# Altium PCB RNG_SATA.PcbDoc (part 2 of 2)
Units mm, origin at the board's own origin, x right, y up, seen from the top; angles counter-clockwise.
Board outline 120 x 50.5 mm, 2 copper layers (TOP, BOT), stack 1.57 mm thick; 83 components, 48 nets, 231 pads, 421 vias.
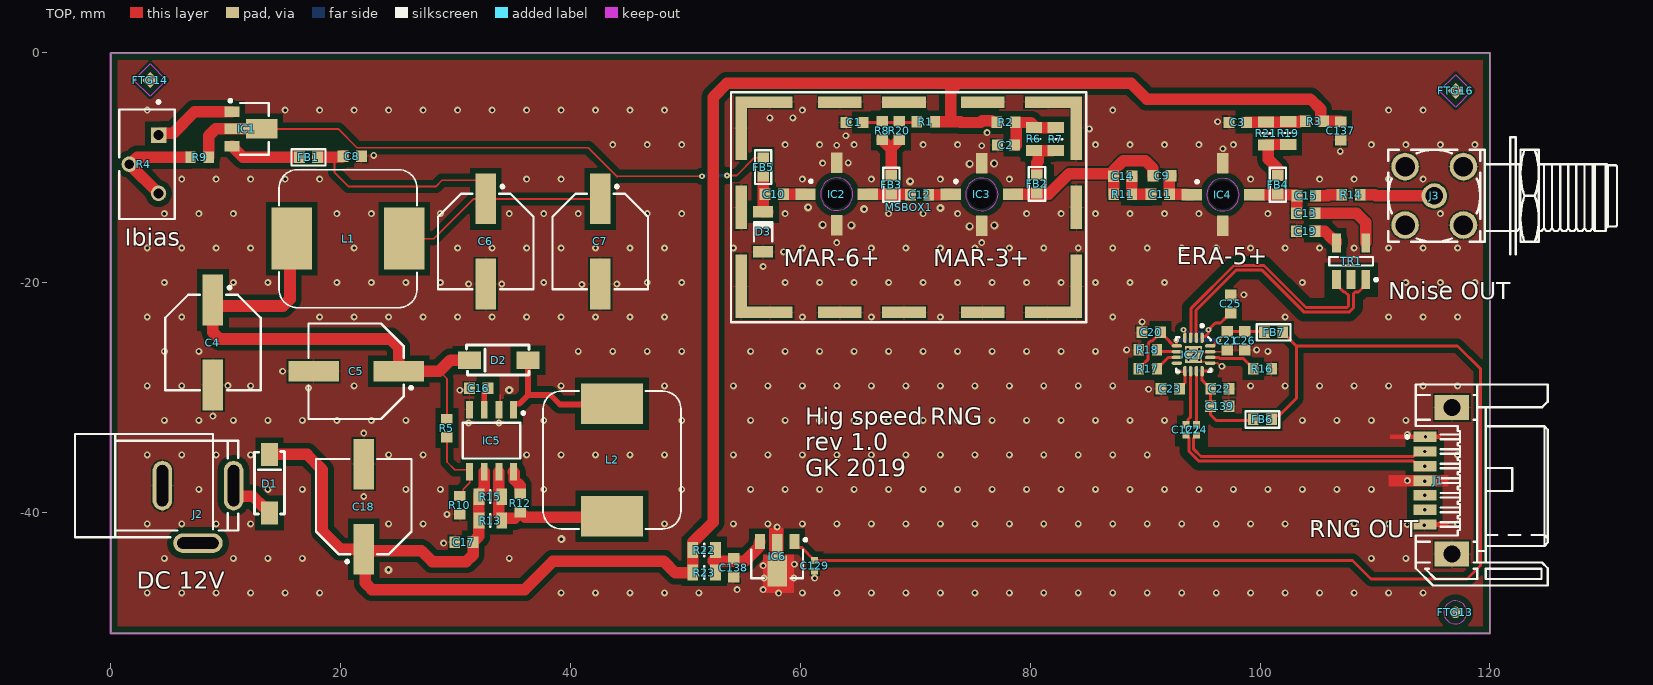
[diagram p0: TOP view]

## Via types
v1: diameter 0.6, hole 0.3, TOP to BOT, tented both sides, 395 vias
v2: diameter 0.5, hole 0.2, TOP to BOT, tented both sides, 13 vias
v3: diameter 0.7, hole 0.3, TOP to BOT, tented both sides, 7 vias
v4: diameter 0.7, hole 0.4, TOP to BOT, tented both sides, 6 vias

## Nets (pads, with @x,y where several pads share a name; then routed paths per layer and width w, separated by ;. In a path a pad name is that pad's centre, name@x,y a point inside that pad or via, vN(x,y) a via of type N, cw(c..) or ccw(c..) an arc to the next point about the centre after c; other vN are vias at no path point) (continued)
NetD2_A: (continued)
  TOP w0.508: IC5.1 35.04,-30.556 35.086,-30.51 35.561,-30.51 36.32,-29.751 ; D2.A 36.32,-29.751 ; L2.2@42.592,-30.591 39.1,-30.591 38.26,-29.751 36.32,-29.751
NetFB1_2: FB1.2 IC1.3 | length 6.3
  TOP w1.016: IC1.3 10.63,-8.104 10.688,-8.162 10.688,-8.246 11.516,-9.074 FB1.2
NetFB2_2: FB2.2 R6.1 R7.1 | length 3.3
  TOP w1: FB2.2 80.587,-9.568 80.714,-9.441 80.714,-8.499 R7.1@81.911,-8.499
NetFB3_2: FB3.2 R8.1 R20.1 | length 4.5
  TOP w1: R8.1 67.912,-8.347 ; FB3.2 67.912,-8.347 ; R20.1 67.912,-8.262 67.912,-8.347
NetFB4_2: FB4.2 R19.1 R21.1 | length 5
  TOP w1: R21.1 R21.1@100.705,-7.992 ; FB4.2 101.538,-10.056 100.73,-9.248 100.73,-8.017 R21.1@100.705,-7.992 ; R19.1 100.734,-7.963 R21.1@100.705,-7.992
NetFB5_1: FB5.1 IC1.2 R9.1 | length 52.8
  TOP w0.152: IC1.2@13.146,-6.604 19.802,-6.604 21.436,-8.238 41.554,-8.238 44.086,-10.77 44.131,-10.725 v2(51.442,-10.725) ; v2(53.619,-10.661) 54.459,-10.661 55.996,-9.125 FB5.1
  TOP w1.016: R9.1 8.546,-7.199 9.141,-6.604 10.846,-6.604 IC1.2@13.146,-6.604
  BOT w0.152: v2(51.442,-10.725) 51.535,-10.725 51.58,-10.77 51.688,-10.661 v2(53.619,-10.661)
NetIC1_1: IC1.1 R4.1 | length 7.2
  TOP w1.016: R4.1 4.333,-6.97 5.429,-6.97 7.296,-5.104 IC1.1
NetIC5_5: IC5.5 R5.1 R10.2 | length 6.9
  TOP w0.152: R5.1 29.261,-35.589 29.934,-36.262 31.061,-36.262 IC5.5 31.23,-37.386 30.665,-37.952 30.665,-38.261 R10.2
NetIC5_7: IC5.7 L2.1 R12.1 R13.2 R15.2 | length 12.6
  TOP w1: IC5.7 33.77,-40.258 R13.2@34.028,-40.516 ; R13.2 R13.2@34.028,-40.516 ; 35.149,-40.491 34.053,-40.491 R13.2@34.028,-40.516 ; R12.1 36.072,-40.391 L2.1@42.592,-40.391
NetIC5_8: IC5.8 R12.2 | length 2.2
  TOP w1: IC5.8 35.13,-36.521 35.13,-37.149 35.635,-37.655 R12.2
NetIC27_6: IC27.6 R18.1 | length 1.8
  TOP w0.259: R18.1 91.185,-25.983 IC27.6
NetIC27_7: IC27.7 R17.1 | length 2.2
  TOP w0.259: R17.1 91.035,-27.433 91.355,-27.112 91.405,-27.112 92.035,-26.483 IC27.7
NetIC27_14: IC27.14 R16.2 | length 4.2
  TOP w0.259: IC27.14 95.666,-26.49 96.419,-26.49 96.525,-26.597 98.565,-26.597 99.401,-27.433 R16.2
NetJ3_1: J3.1 R14.2 | length 6.5
  TOP w1: R14.2 109.966,-12.33 110.068,-12.432 J3.1
NetR4_2: R4.2 R4.3 R9.2 | length 9.2
  TOP w1.016: R4.3 R4.2 1.716,-9.677 2.319,-9.074 R9.2
P5V0: C129.1 FB6.1 FB7.1 IC6.1 | length 104.8
  TOP w0.254: IC6.1 59.488,-42.685 59.811,-43.008 60.095,-43.008 C129.1 108.033,-44.152 109.652,-45.771 117.992,-45.771 119.177,-44.587 119.177,-27.475 117.184,-25.483 103.149,-25.483 ; FB6.1 101.344,-31.537 101.664,-31.537 103.149,-30.052 103.149,-25.483 ; FB7.1 101.968,-24.327 102.316,-24.675 102.341,-24.675 103.149,-25.483
P12V0: C17.2 C18.1 C137.2 D1.K IC5.6 R1.2 R2.2 R3.2 R13.1 R15.1 R22.1 R23.1 | length 174.2
  TOP w1: D1.K 17.084,-34.931 18.415,-36.262 18.415,-41.605 19.981,-43.172 C18.1 C18.1@22.145,-43.295 ; IC5.6 32.5,-37.957 32.028,-38.43 R15.1 R13.1 32.028,-42.051 C17.2 31.534,-43.661 30.948,-44.247 27.985,-44.247 27.034,-43.295 C18.1@22.145,-43.295 ; R1.2@71.582,-6 73.068,-6 ; R2.2@77.252,-6.049 76.816,-6.049 76.675,-5.908 75.823,-5.908 75.682,-6.049 73.961,-6.049 73.913,-6 73.068,-6 ; C137.2 106.974,-5.955 R3.2 105.271,-5.955 105.271,-4.904 104.377,-4.009 90.141,-4.009 88.773,-2.642 73.717,-2.642 ; C18.1@22.145,-43.295 22.147,-43.297 22.147,-46.099 22.733,-46.685 36.015,-46.685 38.479,-44.221 48.111,-44.221 49.128,-45.238 50.648,-45.238 50.648,-43.502 50.648,-43.241 50.648,-42.573 52.414,-40.807 52.414,-3.847 53.619,-2.642 73.717,-2.642 ; 73.068,-6 73.068,-3.29 73.717,-2.642
P34V0: C6.1 C7.1 C8.2 FB1.1 L1.2 | length 37.9
  TOP w0.152: 19.468,-9.074 19.468,-10.374 20.718,-11.624 28.277,-11.624 28.827,-11.074 32.828,-11.074 32.828,-12.021 32.5,-12.348 32.635,-12.483 C6.1 ; L1.2 28.118,-16.154 31.573,-12.699 C6.1 ; C7.1 C6.1
  TOP w1.016: FB1.1 19.468,-9.074 20.11,-9.074 C8.2
RD_N: J1.5 J15.3
  other v1: 114.325,-38.481
RD_P: J1.6 J15.2
  other v1: 114.325,-39.751
TD_N: C127.1 J1.3 J15.5 | length 22.6
  TOP w0.259: C127.1 93.814,-33.491 93.814,-34.641 94.685,-35.512 113.346,-35.512 113.775,-35.941 v1(114.325,-35.941)
TD_P: C24.2 J1.2 J15.6 | length 21.9
  TOP w0.259: C24.2 94.226,-33.491 94.226,-34.471 94.855,-35.1 113.346,-35.1 113.775,-34.671 v1(114.325,-34.671)
pads on no net: FTG13.FTG2 FTG14.1 FTG16.1 IC2.5 IC3.5 IC4.5 IC27.8 J2.2 TR1.2

## Polygon pours and split planes (outlines as drawn)
GND on BOT "NONET_L-01_P-001" (solid, remove dead copper, pour order 2): 0,0 120,0 120,-50.5 0,-50.5
GND on TOP "NONET_L-01_P-001" (solid, remove dead copper, pour order 12): 0,0 120,0 120,-50.5 0,-50.5

## Keep-outs
TOP:
  circle w0.1: c96.762,-12.33 r1.415
  circle w0.1: c75.786,-12.3 r1.415
  circle w0.1: c63.168,-12.286 r1.415
KeepOutLayer:
  lines w0.2: 0,-50.5 0,0 120,0 120,-50.5 0,-50.5

## Other copper
TOP:
  rectangle net GND: 111.319,-33.601 115.725,-33.201
  rectangle net GND: 112.266,-41.221 116.372,-40.821
  rectangle net GND: 111.152,-37.697 116.372,-36.725
  rectangle net GND: 57.282,-44.152 58.53,-41.327
  rectangle net GND: 56.768,-46.99 59.462,-43.643
  pour cut-out: 70.203,-11.673 70.548,-11.673 70.548,-12.977 70.203,-12.977
  pour cut-out: 57.567,-11.622 57.912,-11.622 57.912,-12.927 57.567,-12.927
  pour cut-out: 82.105,-9.677 82.104,-9.676 79.661,-9.676 79.661,-11.811 79.643,-11.83 79.733,-11.919 82.111,-11.919
  pour cut-out: 103.829,-11.754 104.174,-11.754 104.144,-11.784 104.144,-16.145 103.799,-16.145 103.773,-16.119
  pour cut-out: 88.018,-12.906 92.021,-12.906 92.071,-12.957 92.613,-12.416 92.613,-11.001 91.592,-9.98 88.304,-9.98 87.803,-10.481 87.803,-12.825
BOT:
  rectangle net GND: 112.266,-37.523 115.833,-37.011

## Silkscreen, mask and mechanical layers (free items; w line width, h text height)
TopOverlay:
  text "Ibias" at 1.236,-16.786 h1.5
  text "ERA-5+" at 92.759,-18.377 h1.5
  text "MAR-6+" at 58.539,-18.575 h1.5
  text "MAR-3+" at 71.582,-18.575 h1.5
  text "Noise OUT" at 111.152,-21.428 h1.5
  text "Hig speed RNG / rev 1.0  / GK 2019" at 60.421,-36.831 h1.5
  text "RNG OUT" at 104.259,-42.152 h1.5
  text "DC 12V" at 2.261,-46.608 h1.5
Mechanical1:
  lines w0.1: 0,-50.5 0,-41 0,-36 ; 9.038,0 9.038,0 0,0 0,-28.5 0,-36 ; 10.51,-50.5 107,-50.5 ; 108,0 120,0 ; 120,-50.5 120,0 ; 0,-36 0,-36 ; 120,0 120,0
  lines w0.152: 0,-50.5 10.51,-50.5 ; 9.038,0 108,0 ; 107,-50.5 112.979,-50.5 120,-50.5